# EAGLE board STM32-PROX (EAGLE 6.5.0), part 1 of 2
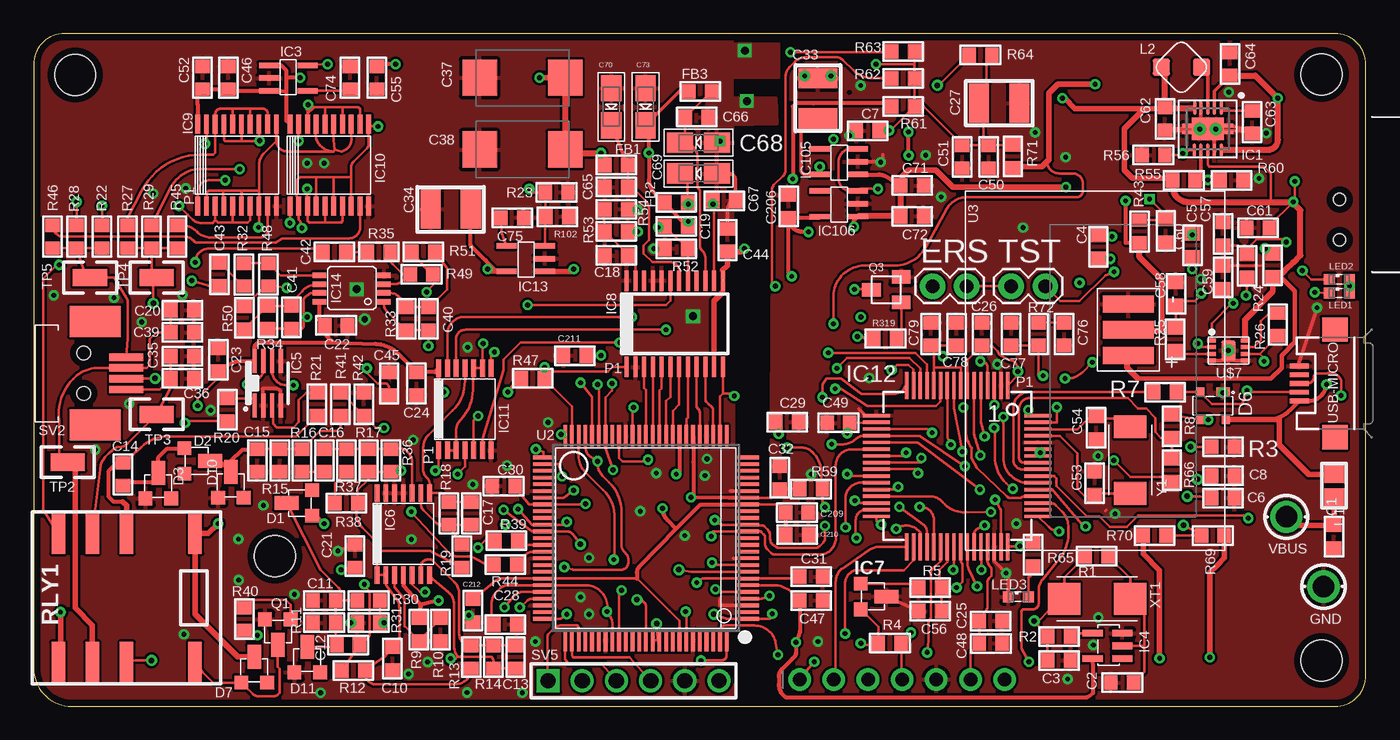
[diagram p0: board, top side]
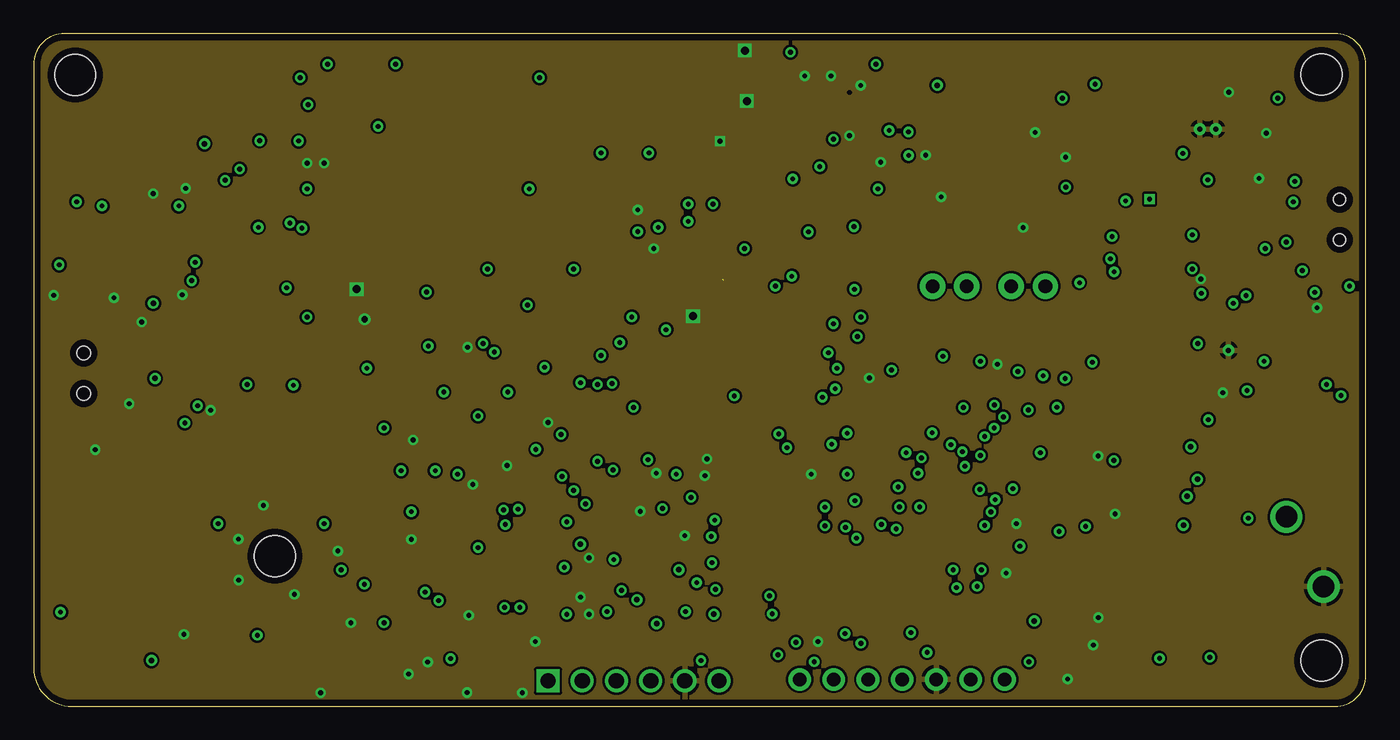
[diagram p1: board, inner layer $GND]
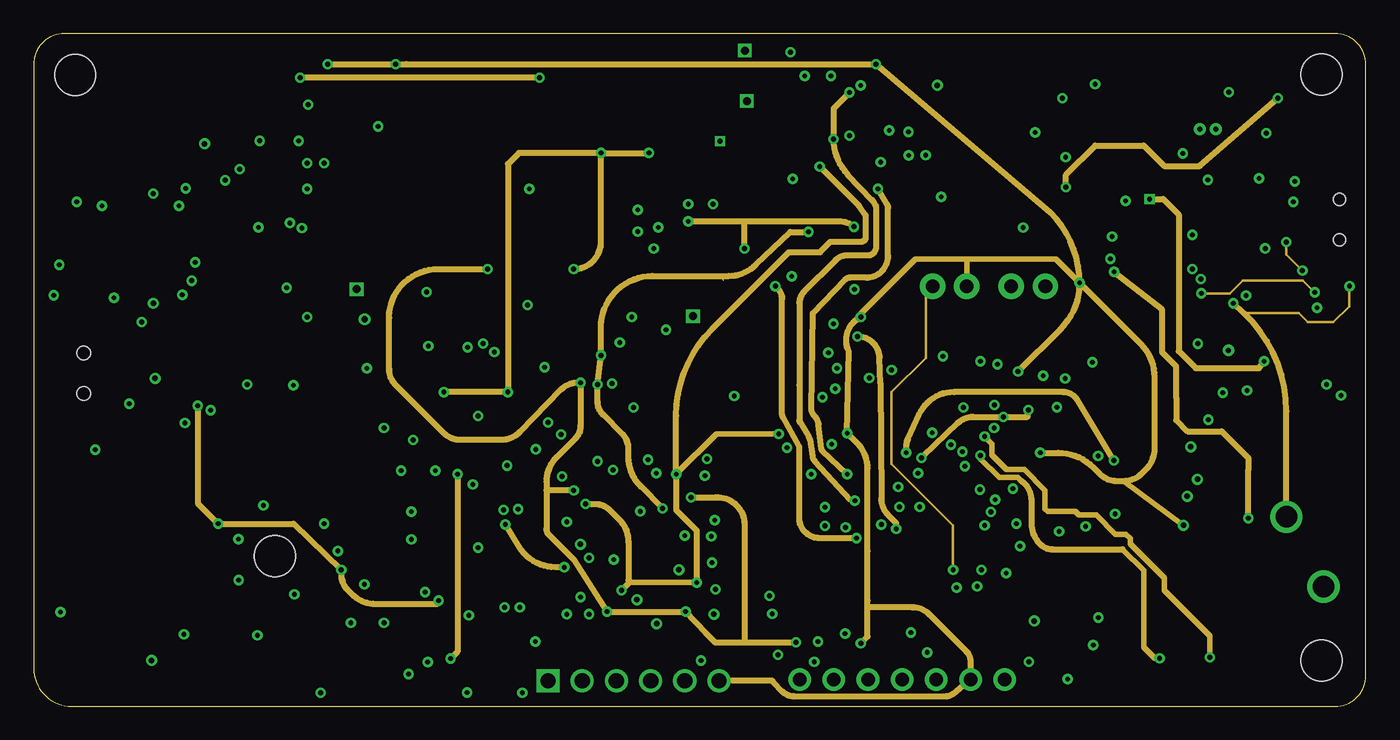
[diagram p2: board, inner layer $VCC]
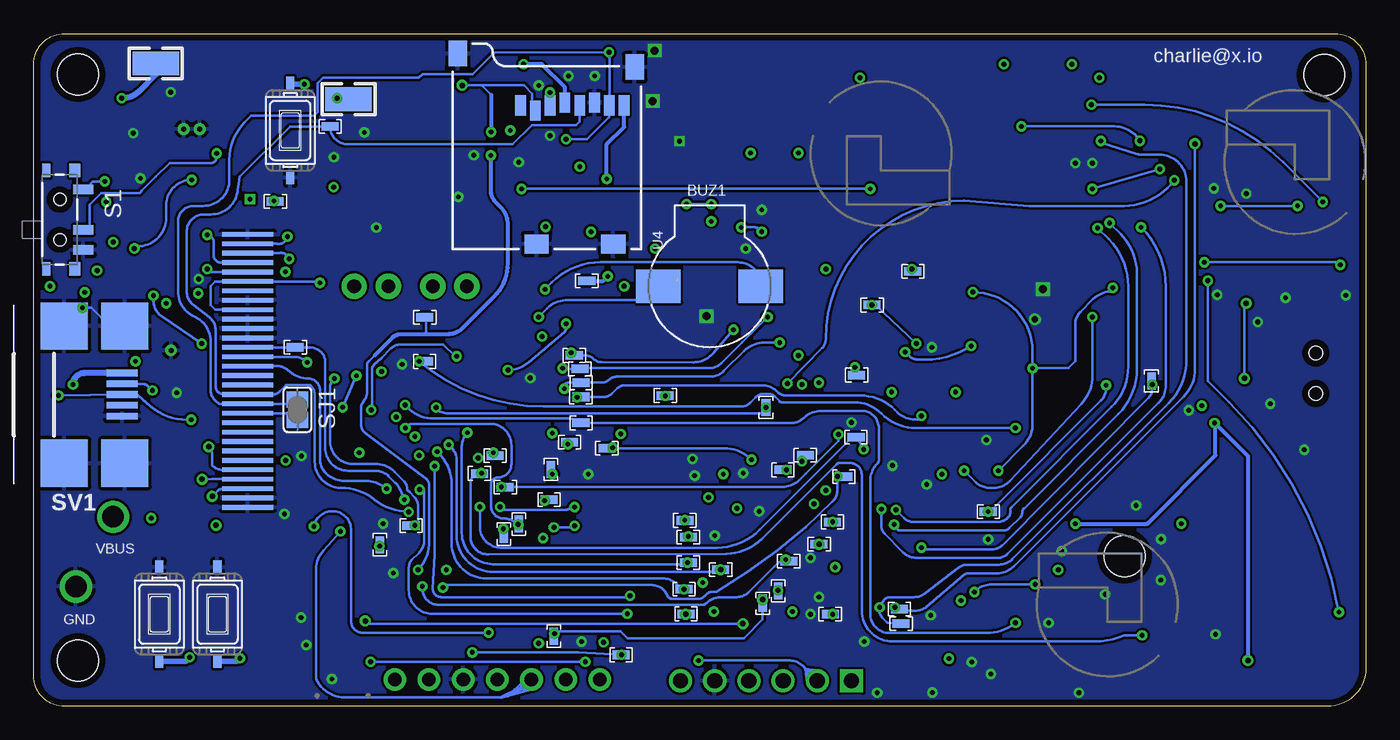
[diagram p3: board, bottom side, seen from below]

Size 99 x 50 mm. Coordinates in mm from the lower left corner, seen from the top.
Outline: 99,2.29 99,47.71 arc90 96.71,50 2.29,50 arc90 0,47.71 0,2.83 arc90 2.83,0 96.71,0 arc90 99,2.29
Copper layers ((1*2)*(3*16)): Top 0.0356mm / dielectric 1.5011mm / $GND 0.0356mm / dielectric 0.1499mm / $VCC 0.0356mm / dielectric 0.2007mm / Bottom 0.0356mm
Design rules "SilverCircuits4layer *": minimum track width 7mil, minimum drill 14mil, track to track 7mil, track to pad 7mil, pad to pad 7mil, via to via 7mil, smd to smd 0mil, copper to edge 20mil, drill to drill 8mil, minimum pad ring 10mil, minimum via ring 8mil, stop-mask expansion 4mil, vias tented up to drill 0mil, thermal gap 10mil
Net classes: 0 default: width 0.203 mm; 1 adc: width 0.203 mm; 2 power: width 0.203 mm, drill 0.254 mm, clearance 0.178 mm

## Footprints (pad centres in the part's own frame; a part is rotated, then mirrored left to right if it is on the bottom)
BUZZER = smd 3.3 x 2.5: 1 3.81,0; 2 -3.81,0
RLC_0603 = smd 1 x 1.1: 1 -0.85,0; 2 0.85,0
RLC_1210 = smd 1.5 x 2.9: 1 -1.5,0; 2 1.5,0
D/7343-31R = smd 2.55 x 2.7: + 3.175,0; - -3.175,0
EIA3216-18/A-R = smd 1.95 x 1.5: + 1.375,0; - -1.375,0
SOT23-3LEAD = smd 1.016 x 1.016: 1 -0.94,-0.762; 2 0.965,-0.762 | smd 1.016 x 1.778: 3 0.013,1.143
USBUG_SOT143B = smd 1 x 0.7: 1 -0.75,-1 | smd 0.6 x 0.7: 2 0.95,-1; 3 0.95,1; 4 -0.95,1
QFN-10 = smd 0.254 x 1.016: 1 -1,-1.57; 2 -0.5,-1.57; 3 0,-1.57; 4 0.5,-1.57; 5 0.975,-1.57; 6 1,1.57; 7 0.5,1.57; 8 0,1.57; 9 -0.5,1.57; 10 -1,1.57 | smd 2.4 x 1.65: P0 0,0 | smd 0.7 x 0.28: P1 -1.55,-0.25; P2 1.55,-0.25; P3 1.55,0.25; P4 -1.55,0.25 | drill 0.381: V0 -0.6,0; V1 0.6,0
SOT-23-5 = smd 0.4 x 1.5: 1 -0.94,-1.422; 2 0.01,-1.422; 3 0.96,-1.422; 4 0.96,1.428; 5 -0.94,1.428
SMV-5 = smd 1.5 x 0.5: 1 0,0; 2 0,-0.95; 3 0,-1.9; 4 2.2,-1.9; 5 2.2,0
SOT-23-8-OR-MSOP-8 = smd 0.325 x 1.8: 1 -0.975,-1.65; 2 -0.325,-1.65; 3 0.325,-1.65; 4 0.975,-1.65; 5 0.975,1.65; 6 0.325,1.65; 7 -0.325,1.65; 8 -0.975,1.65
TSSOP-14 = smd 1.3 x 0.36: 1 0,0; 2 0,-0.65; 3 0,-1.3; 4 0,-1.95; 5 0,-2.6; 6 0,-3.25; 7 0,-3.9; 8 6.095,-3.9; 9 6.095,-3.25; 10 6.095,-2.6; 11 6.095,-1.95; 12 6.095,-1.3; 13 6.095,-0.65; 14 6.095,0
TSSOP-24 = smd 0.3 x 1.5: 1 -2.925,-3.2; 2 -2.275,-3.2; 3 -1.625,-3.2; 4 -0.975,-3.2; 5 -0.325,-3.2; 6 0.325,-3.2; 7 0.975,-3.2; 8 1.625,-3.2; 9 2.275,-3.2; 10 2.925,-3.2; 11 3.575,-3.2; 12 4.225,-3.2; 13 4.225,3.2; 14 3.575,3.2; 15 2.925,3.2; 16 2.275,3.2; 17 1.625,3.2; 18 0.975,3.2; 19 0.325,3.2; 20 -0.325,3.2; 21 -0.975,3.2; 22 -1.625,3.2; 23 -2.275,3.2; 24 -2.925,3.2
TSSOP-20 = smd 1.4 x 0.36: 1 0,0; 2 0,-0.65; 3 0,-1.3; 4 0,-1.95; 5 0,-2.6; 6 0,-3.25; 7 0,-3.9; 8 0,-4.55; 9 0,-5.2; 10 0,-5.85; 11 6.095,-5.85; 12 6.095,-5.2; 13 6.095,-4.55; 14 6.095,-3.9; 15 6.095,-3.25; 16 6.095,-2.6; 17 6.095,-1.95; 18 6.095,-1.3; 19 6.095,-0.65; 20 6.095,0
LQFP-64 = smd 0.25 x 2: 1 -3.81,-6.35; 2 -3.31,-6.35; 3 -2.81,-6.35; 4 -2.31,-6.35; 5 -1.81,-6.35; 6 -1.31,-6.35; 7 -0.81,-6.35; 8 -0.31,-6.35; 9 0.19,-6.35; 10 0.69,-6.35; 11 1.19,-6.35; 12 1.69,-6.35; 13 2.19,-6.35; 14 2.69,-6.35; 15 3.19,-6.35; 16 3.69,-6.35; 33 3.69,5.65; 34 3.19,5.65; 35 2.69,5.65; 36 2.19,5.65; 37 1.69,5.65; 38 1.19,5.65; 39 0.69,5.65; 40 0.19,5.65; 41 -0.31,5.65; 42 -0.81,5.65; 43 -1.31,5.65; 44 -1.81,5.65; 45 -2.31,5.65; 46 -2.81,5.65; 47 -3.31,5.65; 48 -3.81,5.65 | smd 2 x 0.25: 17 5.94,-4.1; 18 5.94,-3.6; 19 5.94,-3.1; 20 5.94,-2.6; 21 5.94,-2.1; 22 5.94,-1.6; 23 5.94,-1.1; 24 5.94,-0.6; 25 5.94,-0.1; 26 5.94,0.4; 27 5.94,0.9; 28 5.94,1.4; 29 5.94,1.9; 30 5.94,2.4; 31 5.94,2.9; 32 5.94,3.4; 49 -6.06,3.4; 50 -6.06,2.9; 51 -6.06,2.4; 52 -6.06,1.9; 53 -6.06,1.4; 54 -6.06,0.9; 55 -6.06,0.4; 56 -6.06,-0.1; 57 -6.06,-0.6; 58 -6.06,-1.1; 59 -6.06,-1.6; 60 -6.06,-2.1; 61 -6.06,-2.6; 62 -6.06,-3.1; 63 -6.06,-3.6; 64 -6.06,-4.1
MSOP8 = smd 0.41 x 1.02: 1 0,0; 2 0.65,0; 3 1.3,0; 4 1.95,0; 5 1.95,4.8; 6 1.3,4.8; 7 0.65,4.8; 8 0,4.8
1X02 = drill 1.016 pad 1.88: 1 0,0; 2 2.54,0
1X07_ROUND = drill 1 pad 1.676: 1 -7.62,0; 2 -5.08,0; 3 -2.54,0; 4 0,0; 5 2.54,0; 6 5.08,0; 7 7.62,0
CDRH2D18 = smd 1.3 x 1.3 rotated 225: P$1 -1.061,1.061 | smd 1.3 x 1.3 rotated 315: P$2 1.061,-1.061
LED_SML0603 = smd 0.8 x 0.8: A 0.75,0; C -0.75,0
SMD-TESTPOINT = smd 1.27 x 0.635: 1 0,0
SOT-23-3 = smd 1 x 1.4: 1 -0.95,-1.1; 2 0.95,-1.1; 3 0,1.1
G6S-2F = smd 1 x 3: 1 -5.08,-4.78; 3 0,-4.78; 4 2.54,-4.78; 5 5.08,-4.78; 8 5.08,4.78; 9 2.54,4.78; 10 0,4.78; 12 -5.08,4.78
SWITCH-SPST-SMD-A = smd 0.7 x 1.5: 1 -2.25,-1.75; 2 -0.75,-1.75; 3 2.25,-1.75 | smd 1 x 0.6: GND1 -3.65,1; GND3 3.65,1 | smd 1 x 0.8: GND2 -3.65,-1.1; GND4 3.65,-1.1 | hole 0.9: -1.5,0; 1.5,0
SOLDERJUMPER_REFLOW = smd 1.168 x 1.6: 1 -0.762,0; 2 0.762,0
USB-MINIB-SMD = smd 2.3 x 0.5: 1 2,0.4; 2 2,-0.4; 3 2,-1.2; 4 2,-2; 5 2,-2.8 | smd 3.5 x 3.5: TAB0 -2.3,3.9; TAB1 2.2,3.9; TAB2 2.2,-6.3; TAB3 -2.3,-6.3
HIROSE-MQ172-4POS = smd 0.55 x 2.5: 1 -1.2,6.75; 2 -0.4,6.75; 3 0.4,6.75; 4 1.2,6.75 | smd 2.3 x 3.8: P$1 -3.85,4.45; P$2 3.85,4.45 | hole 1: -1.5,3.6; 1.5,3.6
HEADER-MALE-6X1-0.100-UNKEYED = drill 1.143 square: 1 0,6.35 | drill 1.143: 2 0,3.81; 3 0,1.27; 4 0,-1.27; 5 0,-3.81; 6 0,-6.35
SW_TACT_3X6 = smd 1 x 0.6: 1 -3.5,0; 2 3.5,0
KEYSTONE-SMD-TESTPOINT-5015 = smd 2.54 x 1.27: 1 0,0
--MERGED_KEYSTONE-SMD-TESTPOINT-5015 = smd 3.429 x 1.778: 1 0,0
KEYSTONE-PTH-TESTPOINT-5011 = drill 1.6: A 0,0
RLC_0805 = smd 1.3 x 1.5: 1 -0.85,0; 2 0.85,0
VQ100 = smd 0.27 x 1.6: 1 -6,-7.6; 2 -5.5,-7.6; 3 -5,-7.6; 4 -4.5,-7.6; 5 -4,-7.6; 6 -3.5,-7.6; 7 -3,-7.6; 8 -2.5,-7.6; 9 -2,-7.6; 10 -1.5,-7.6; 11 -1,-7.6; 12 -0.5,-7.6; 13 0,-7.6; 14 0.5,-7.6; 15 1,-7.6; 16 1.5,-7.6; 17 2,-7.6; 18 2.5,-7.6; 19 3,-7.6; 20 3.5,-7.6; 21 4,-7.6; 22 4.5,-7.6; 23 5,-7.6; 24 5.5,-7.6; 25 6,-7.6; 51 6,7.6; 52 5.5,7.6; 53 5,7.6; 54 4.5,7.6; 55 4,7.6; 56 3.5,7.6; 57 3,7.6; 58 2.5,7.6; 59 2,7.6; 60 1.5,7.6; 61 1,7.6; 62 0.5,7.6; 63 0,7.6; 64 -0.5,7.6; 65 -1,7.6; 66 -1.5,7.6; 67 -2,7.6; 68 -2.5,7.6; 69 -3,7.6; 70 -3.5,7.6; 71 -4,7.6; 72 -4.5,7.6; 73 -5,7.6; 74 -5.5,7.6; 75 -6,7.6 | smd 1.6 x 0.27: 26 7.6,-6; 27 7.6,-5.5; 28 7.6,-5; 29 7.6,-4.5; 30 7.6,-4; 31 7.6,-3.5; 32 7.6,-3; 33 7.6,-2.5; 34 7.6,-2; 35 7.6,-1.5; 36 7.6,-1; 37 7.6,-0.5; 38 7.6,0; 39 7.6,0.5; 40 7.6,1; 41 7.6,1.5; 42 7.6,2; 43 7.6,2.5; 44 7.6,3; 45 7.6,3.5; 46 7.6,4; 47 7.6,4.5; 48 7.6,5; 49 7.6,5.5; 50 7.6,6; 76 -7.6,6; 77 -7.6,5.5; 78 -7.6,5; 79 -7.6,4.5; 80 -7.6,4; 81 -7.6,3.5; 82 -7.6,3; 83 -7.6,2.5; 84 -7.6,2; 85 -7.6,1.5; 86 -7.6,1; 87 -7.6,0.5; 88 -7.6,0; 89 -7.6,-0.5; 90 -7.6,-1; 91 -7.6,-1.5; 92 -7.6,-2; 93 -7.6,-2.5; 94 -7.6,-3; 95 -7.6,-3.5; 96 -7.6,-4; 97 -7.6,-4.5; 98 -7.6,-5; 99 -7.6,-5.5; 100 -7.6,-6
MICROBUILDER_UG-2864HSWEG01_0.96IN_WRAPAROUND = smd 0.35 x 3.81 bottom: 1 -10.15,8.96; 2 -9.45,8.96; 3 -8.75,8.96; 4 -8.05,8.96; 5 -7.35,8.96; 6 -6.65,8.96; 7 -5.95,8.96; 8 -5.25,8.96; 9 -4.55,8.96; 10 -3.85,8.96; 11 -3.15,8.96; 12 -2.45,8.96; 13 -1.75,8.96; 14 -1.05,8.96; 15 -0.35,8.96; 16 0.35,8.96; 17 1.05,8.96; 18 1.75,8.96; 19 2.45,8.96; 20 3.15,8.96; 21 3.85,8.96; 22 4.55,8.96; 23 5.25,8.96; 24 5.95,8.96; 25 6.65,8.96; 26 7.35,8.96; 27 8.05,8.96; 28 8.75,8.96; 29 9.45,8.96; 30 10.15,8.96
MICRO-SD-SOCKET-PP = smd 0.8 x 1.5: 1 -8.94,10.7; 2 -7.84,10.3; 3 -6.74,10.7; 4 -5.64,10.9; 5 -4.54,10.7; 6 -3.44,10.9; 7 -2.34,10.7; 8 -1.24,10.7 | smd 1.8 x 1.4: CD1 -2.05,0.4; CD2 -7.75,0.4 | smd 1.4 x 1.9: GND1 -13.6,14.55; GND3 -0.45,13.55
STAND-OFF-TIGHT = hole 3.048: 0,0
UDFN-EP = smd 0.3 x 0.65: 1 -0.75,-1.25; 2 -0.25,-1.25; 3 0.25,-1.25; 4 0.75,-1.25; 5 0.75,1.25; 6 0.25,1.25; 7 -0.25,1.25; 8 -0.75,1.25 | smd 1.45 x 1.05: 9 0,0 | drill 0.356: V1 0,0
BATT = smd 1.27 x 3.81: 1 -1.905,0; 2 0,0; 3 1.905,0
USB-MICROB = smd 0.35 x 1.4: D+ 0,2.65; D- -0.65,2.65; GND 1.3,2.65; ID 0.65,2.65; VBUS -1.3,2.65 | smd 1.8 x 1.9: MT1 -4,0; MT2 4,0
XTAL-SMD-CITIZEN-CS10 = smd 2.4 x 2.4: A -0.2,0; B 4.7,0
CRYSTAL-TXC-7A = smd 1.7 x 2.4: P$1 2.485,0; P$2 -2.485,0

## Placement (x,y rotation side)
BUZ1  BUZZER  [BUZZER]  48.77,31.23 180 bottom
C1  33nF  [RLC_0603]  96.62,12.61 270 top
C2  22pF  [RLC_0603]  80.9,1.76 180 top
C3  22pF  [RLC_0603]  76.2,3.41 0 top
C4  1uF  [RLC_0603]  79.12,34.15 270 top
C5  1uF  [RLC_0603]  86.11,34.27 270 top
C6  4.7uF  [RLC_0603]  88.39,15.48 0 top
C7  4.7uF  [RLC_0603]  61.98,42.78 180 top
C8  4.7uF  [RLC_0603]  88.39,17.13 0 top
C10  100nF  [RLC_0603]  26.67,3.54 270 top
C11  1nF  [RLC_0603]  21.59,7.86 180 top
C12  1nF  [RLC_0603]  23.37,4.56 0 top
C13  dnp  [RLC_0603]  35.81,3.67 270 top
C14  22pF  [RLC_0603]  6.64,17.24 270 top
C15  130pF  [RLC_0603]  16.61,18.27 270 top
C16  1nF  [RLC_0603]  21.59,18.27 90 top
C17  dnp  [RLC_0603]  32.51,14.34 90 top
C18  33nF  [RLC_0603]  43.31,33.51 180 top
C19  33nF  [RLC_0603]  47.75,34.02 180 top
C20  dnp  [RLC_0603]  11.05,29.45 0 top
C21  33nF  [RLC_0603]  23.88,11.16 90 top
C22  33nF  [RLC_0603]  22.48,28.3 0 top
C23  33nF  [RLC_0603]  13.72,25.77 90 top
C24  33nF  [RLC_0603]  28.45,23.99 270 top
C25  33nF  [RLC_0603]  71.12,6.33 0 top
C26  33nF  [RLC_0603]  70.48,27.67 90 top
C27  4.7uF  [RLC_1210]  71.75,44.81 0 top
C28  33nF  [RLC_0603]  35.05,6.08 0 top
C29  33nF  [RLC_0603]  56.01,21.13 0 top
C30  33nF  [RLC_0603]  34.92,16.37 180 top
C31  33nF  [RLC_0603]  57.78,9.64 0 top
C32  33nF  [RLC_0603]  55.44,17 90 top
C33  4.7uF  [RLC_1210]  58.29,45.2 90 top
C34  4.7uF  [RLC_1210]  30.99,36.94 180 top
C35  47pF  [RLC_0603]  11.05,26.02 0 top
C36  dnp  [RLC_0603]  11.05,24.37 0 top
C37  100uF  [D/7343-31R]  36.32,46.72 0 top
C38  100uF  [D/7343-31R]  36.32,41.39 0 top
C39  1nF  [RLC_0603]  11.05,27.8 0 top
C40  dnp  [RLC_0603]  29.34,28.81 270 top
C41  dnp  [RLC_0603]  19.15,28.91 270 top
C42  1nF  [RLC_0603]  22.35,33.77 0 top
C43  1nF  [RLC_0603]  13.8,32.11 90 top
C44  33nF  [RLC_0603]  51.56,34.66 90 top
C45  100nF  [RLC_0603]  26.42,23.99 90 top
C46  33nF  [RLC_0603]  14.46,46.72 90 top
C47  33nF  [RLC_0603]  57.78,7.86 0 top
C48  100nF  [RLC_0603]  71.13,4.67 0 top
C49  100nF  [RLC_0603]  59.81,21.07 180 top
C50  100nF  [RLC_0603]  70.97,40.85 270 top
C51  100nF  [RLC_0603]  69,40.85 270 top
C52  1uF  [RLC_0603]  12.55,46.72 90 top
C53  22pF  [RLC_0603]  78.84,16.59 270 top
C54  22pF  [RLC_0603]  78.97,20.7 90 top
C55  1uF  [RLC_0603]  25.5,46.72 270 top
C56  100nF  [RLC_0603]  66.63,7.07 180 top
C57  100nF  [RLC_0603]  88.38,35.11 90 top
C58  100nF  [RLC_0603]  84.88,30.67 90 top
C59  1uF  [RLC_0603]  88.37,31.88 90 top
C60  100nF  [RLC_0603]  84.14,35.34 270 top
C61  1uF  [RLC_0603]  90.98,35.56 180 top
C62  10uF  [RLC_0603]  84.07,43.67 270 top
C63  100nF  [RLC_0603]  90.55,43.42 270 top
C64  10uF  [RLC_0603]  88.9,47.74 90 top
C65  100nF  [RLC_0603]  43.31,38.59 180 top
C66  100nF  [RLC_0603]  49.28,43.8 0 top
C67  100nF  [RLC_0603]  51.31,37.58 0 top
C68  4.7uF  [EIA3216-18/A-R]  49.4,41.89 180 top
C69  4.7uF  [EIA3216-18/A-R]  49.4,39.61 180 top
C70  4.7uF  [EIA3216-18/A-R]  42.93,44.56 270 top
C71  100nF  [RLC_0603]  65.28,38.72 0 top
C72  100nF  [RLC_0603]  65.28,36.43 0 top
C73  4.7uF  [EIA3216-18/A-R]  45.47,44.56 270 top
C74  10nF  [RLC_0603]  23.51,46.72 90 top
C75  10nF  [RLC_0603]  35.56,36.31 0 top
C76  33nF  [RLC_0603]  76.58,27.67 90 top
C77  2nF  [RLC_0603]  72.64,27.67 270 top
C78  2.2uF  [RLC_0603]  68.58,27.67 270 top
C79  1nF  [RLC_0603]  66.67,27.67 270 top
C206  4.7uF  [RLC_0603]  56.1,37.16 90 top
C209  100nF  [RLC_0603]  56.72,14.4 0 top
C210  100nF  [RLC_0603]  56.75,12.74 0 top
C211  100nF  [RLC_0603]  40.22,26.07 180 top
C212  100nF  [RLC_0603]  32.64,7.1 270 top
D1  DIODE-SMD-SOT23  [SOT23-3LEAD]  19.94,15.1 90 top
D2  DIODE-SMD-SOT23  [SOT23-3LEAD]  11.96,18.25 270 top
D3  DIODE-SMD-SOT23  [SOT23-3LEAD]  9.26,16.21 0 top
D6  USBUG_PRTR5V0U2X  [USBUG_SOT143B]  87.63,22.34 180 top
D7  DIODE-SMD-SOT23  [SOT23-3LEAD]  16.38,2.52 0 top
D10  DIODE-SMD-SOT23  [SOT23-3LEAD]  14.65,16.27 0 top
D11  DIODE-SMD-SOT23  [SOT23-3LEAD]  20.32,3.29 0 top
FB1  600 OHM  [RLC_0603]  43.31,40.24 180 top
FB2  600 OHM  [RLC_0603]  47.75,37.45 180 top
FB3  600 OHM  [RLC_0603]  49.53,45.7 180 top
IC1  [QFN-10]  87.25,42.91 180 top
IC3  PQ1X331M2ZP-3V3-LDO-SOT-23-5  [SOT-23-5]  18.92,46.7 270 top
IC4  HCU-INVERTER  [SMV-5]  80.9,3.54 180 top
IC5  TLV3502  [SOT-23-8-OR-MSOP-8]  17.4,24.01 0 top
IC6  MCP6294  [TSSOP-14]  25.53,9.76 90 top
IC7  MCP100  [SOT23-3LEAD]  62.23,8.17 270 top
IC8  TLC5540  [TSSOP-24]  46.99,28.43 0 top
IC9  74XX244  [TSSOP-20]  12.19,37.18 90 top
IC10  74XX244  [TSSOP-20]  19.05,37.18 90 top
IC11  CD4066  [TSSOP-14]  30.1,19.03 90 top
IC12  AT91SAM7S512B  [LQFP-64]  68.58,17.51 180 top
IC13  PQ1X331M2ZP-3V3-LDO-SOT-23-5  [SOT-23-5]  36.58,33.26 90 top
IC14  AD8052  [MSOP8]  26.04,30.08 90 top
IC105  MCP1824T-250  [SOT-23-5]  59.84,40.47 90 top
IC106  MCP1824T-120  [SOT-23-5]  59.84,37.34 90 top
JP1  [1X02]  72.64,31.23 0 top
JP2  [1X02]  69.34,31.23 180 top
JP4  [1X07_ROUND]  64.54,2 0 top
L2  CDRH2D18/HPNP-2R2NC  [CDRH2D18]  85.29,47.5 45 top
LED1  [LED_SML0603]  97.03,30.72 0 top
LED2  [LED_SML0603]  97.03,31.73 0 top
LED3  [LED_SML0603]  73.17,8.14 0 top
OE1  TESTPAD  [SMD-TESTPOINT]  43.31,17.57 180 bottom
OE2  TESTPAD  [SMD-TESTPOINT]  41.66,18.65 180 bottom
OE3  TESTPAD  [SMD-TESTPOINT]  34.67,7.22 0 bottom
OE4  TESTPAD  [SMD-TESTPOINT]  34.54,6.13 0 bottom
OE5  TESTPAD  [SMD-TESTPOINT]  28.07,14.46 0 bottom
OE6  TESTPAD  [SMD-TESTPOINT]  15.94,24.18 90 bottom
OE7  TESTPAD  [SMD-TESTPOINT]  39.79,6.84 180 bottom
OE8  TESTPAD  [SMD-TESTPOINT]  44.83,7.67 270 bottom
OE9  TESTPAD  [SMD-TESTPOINT]  52.08,23.1 0 bottom
OE10  TESTPAD  [SMD-TESTPOINT]  40.64,12.05 0 bottom
OE11  TESTPAD  [SMD-TESTPOINT]  39.62,13.7 180 bottom
Q1  NPN-SOT23-2N3904  [SOT23-3LEAD]  18.16,5.7 180 top
Q3  MMBT2222  [SOT-23-3]  63.37,30.96 90 top
R1  1M  [RLC_0603]  78.99,11.16 180 top
R2  10Ohm  [RLC_0603]  76.2,5.19 180 top
R3  820K  [RLC_0603]  88.39,19.29 180 top
R4  10K  [RLC_0603]  63.63,4.68 0 top
R5  10K  [RLC_0603]  66.61,8.81 0 top
R6  0 ohm  [RLC_0603]  92.08,32.78 270 top
R7  27Ohm  [RLC_0603]  84.07,23.35 180 top
R8  27Ohm  [RLC_0603]  84.58,20.81 270 top
R9  100K  [RLC_0603]  28.64,5.7 90 top
R10  100K  [RLC_0603]  30.23,5.7 90 top
R11  510K  [RLC_0603]  21.59,6.21 0 top
R12  100K  [RLC_0603]  23.75,2.65 180 top
R13  10K  [RLC_0603]  32.51,3.67 90 top
R14  10K  [RLC_0603]  34.16,3.67 270 top
R15  10K  [RLC_0603]  18.29,18.27 90 top
R16  zerohm  [RLC_0603]  19.94,18.27 270 top
R17  10K  [RLC_0603]  24.89,18.27 90 top
R18  10K  [RLC_0603]  30.86,14.34 90 top
R19  10K  [RLC_0603]  31.81,11.16 90 top
R20  240K  [RLC_0603]  14.39,22.04 90 top
R21  24K  [RLC_0603]  21.06,22.46 90 top
R22  33Ohm  [RLC_0603]  5.08,34.91 270 top
R23  1K  [RLC_0603]  38.86,38.21 180 top
R24  1K  [RLC_0603]  90.17,32.75 270 top
R25  1K  [RLC_0603]  84.84,27.29 270 top
R26  215.9K  [RLC_0603]  92.46,28.38 270 top
R27  33Ohm  [RLC_0603]  6.99,34.91 270 top
R28  33Ohm  [RLC_0603]  3.17,34.91 270 top
R29  33Ohm  [RLC_0603]  8.76,34.91 270 top
R30  10M  [RLC_0603]  24.89,7.86 0 top
R31  240K  [RLC_0603]  24.89,6.21 0 top
R32  zerohm  [RLC_0603]  15.62,32.09 90 top
R33  2.4K  [RLC_0603]  27.69,28.81 270 top
R34  10K  [RLC_0603]  17.4,28.91 270 top
R35  zerohm  [RLC_0603]  25.65,33.77 0 top
R36  dnp  [RLC_0603]  26.54,18.27 90 top
R37  dnp  [RLC_0603]  23.24,18.27 90 top
R38  dnp  [RLC_0603]  23.24,15.1 180 top
R39  1K  [RLC_0603]  35.12,12.3 0 top
R40  10K  [RLC_0603]  15.65,6.49 90 top
R41  10M  [RLC_0603]  22.81,22.46 90 top
R42  1M  [RLC_0603]  24.54,22.46 270 top
R43  74.74K  [RLC_0603]  82.17,35.29 90 top
R44  1K  [RLC_0603]  35.05,10.53 0 top
R45  10K  [RLC_0603]  10.67,34.91 270 top
R46  10K  [RLC_0603]  1.4,34.91 270 top
R47  10K  [RLC_0603]  37.08,24.37 0 top
R48  dnp  [RLC_0603]  17.45,32.09 90 top
R49  2.4K  [RLC_0603]  28.83,32.11 180 top
R50  10K  [RLC_0603]  15.65,28.89 270 top
R51  2.4K  [RLC_0603]  28.96,33.77 0 top
R52  100Ohm  [RLC_0603]  47.75,35.67 0 top
R53  330Ohm  [RLC_0603]  43.31,35.29 0 top
R54  100Ohm  [RLC_0603]  43.31,36.94 180 top
R55  953K 1%  [RLC_0603]  85.47,39.1 180 top
R56  10K  [RLC_0603]  83.21,40.98 0 top
R59  3.3K  [RLC_0603]  57.77,16.15 180 top
R60  95.3K 1%  [RLC_0603]  89.03,39.1 180 top
R61  10K  [RLC_0603]  64.62,44.59 0 top
R62  10K  [RLC_0603]  64.62,46.67 0 top
R63  10K  [RLC_0603]  64.62,48.67 0 top
R64  10K  [RLC_0603]  70.36,48.41 0 top
R65  330Ohm  [RLC_0603]  74.27,11.27 270 top
R66  1.5K  [RLC_0603]  84.58,17.55 90 top
R69  10K  [RLC_0603]  87.63,12.68 180 top
R70  10K  [RLC_0603]  83.31,12.68 0 top
R71  10K  [RLC_0603]  72.77,40.88 90 top
R72  330Ohm  [RLC_0603]  74.68,27.67 270 top
R102  10K  [RLC_0603]  38.91,36.39 0 top
R319  100Ohm  [RLC_0603]  63.29,27.34 180 top
RLY1  G6S-2H  [G6S-2F]  6.91,8.06 180 top
S1  [SWITCH-SPST-SMD-A]  97.06,36.17 90 bottom
SJ1  [SOLDERJUMPER_REFLOW]  79.39,22.05 270 bottom
SV1  USB-MINIB  [USB-MINIB-SMD]  94.42,24.37 0 bottom
SV2  HIROSE-MQ172-4POS  [HIROSE-MQ172-4POS]  0.13,24.75 270 top
SV5  HEADER-MALE-6X1  [HEADER-MALE-6X1-0.100-UNKEYED]  44.58,1.89 90 top
SW1  SW_TACT_2P-3X6  [SW_TACT_3X6]  79.93,42.81 90 bottom
SW2  SW_TACT_2P-3X6  [SW_TACT_3X6]  85.34,6.84 270 bottom
SW3  SW_TACT_2P-3X6  [SW_TACT_3X6]  89.66,6.84 270 bottom
TP1  TESTPAD  [SMD-TESTPOINT]  36.7,29.83 0 bottom
TP2  TESTPADKEYSTONE-SMD  [KEYSTONE-SMD-TESTPOINT-5015]  2.54,18.14 180 top
TP3  TESTPADKEYSTONE-SMD  [KEYSTONE-SMD-TESTPOINT-5015]  9.14,21.7 180 top
TP4  TESTPADKEYSTONE-SMD  [KEYSTONE-SMD-TESTPOINT-5015]  9.14,31.86 180 top
TP5  TESTPADKEYSTONE-SMD  [KEYSTONE-SMD-TESTPOINT-5015]  4.19,31.86 180 top
TP6  TESTPAD  [SMD-TESTPOINT]  44.58,22.21 90 bottom
TP7  TESTPAD  [SMD-TESTPOINT]  69.93,28.93 0 bottom
TP9  TESTPADKEYSTONE-SMD  [--MERGED_KEYSTONE-SMD-TESTPOINT-5015]  75.61,45.12 0 bottom
TP10  TESTPADKEYSTONE-SMD  [--MERGED_KEYSTONE-SMD-TESTPOINT-5015]  89.92,47.78 0 bottom
TP11  TESTPAD  [SMD-TESTPOINT]  64.07,12.79 90 bottom
TP12  TESTPADKEYSTONE-PTH  [KEYSTONE-PTH-TESTPOINT-5011]  95.86,8.9 0 top
TP16  TESTPAD  [SMD-TESTPOINT]  81.05,37.53 0 bottom
TP18  TESTPAD  [SMD-TESTPOINT]  33.67,32.34 0 bottom
TP19  TESTPAD  [SMD-TESTPOINT]  43.68,8.59 270 bottom
TP20  TESTPAD  [SMD-TESTPOINT]  57.89,31.62 180 bottom
TP22  TESTPAD  [SMD-TESTPOINT]  60.57,17.61 270 bottom
TP23  TESTPAD  [SMD-TESTPOINT]  64.71,18.62 0 bottom
TP24  TESTPAD  [SMD-TESTPOINT]  55.34,3.82 180 bottom
TP25  TESTPAD  [SMD-TESTPOINT]  38.78,17.06 180 bottom
TP26  TESTPAD  [SMD-TESTPOINT]  42.88,10.79 180 bottom
TP28  TESTPAD  [SMD-TESTPOINT]  79.56,26.67 0 bottom
TP29  TESTPAD  [SMD-TESTPOINT]  70.97,13.42 0 bottom
TP30  TESTPAD  [SMD-TESTPOINT]  62.94,13.54 270 bottom
TP31  TESTPAD  [SMD-TESTPOINT]  47.96,10.16 0 bottom
TP32  TESTPAD  [SMD-TESTPOINT]  50.67,8.71 180 bottom
TP33  TESTPAD  [SMD-TESTPOINT]  50.35,10.67 180 bottom
TP34  TESTPAD  [SMD-TESTPOINT]  59.19,19.62 0 bottom
TP35  TESTPAD  [SMD-TESTPOINT]  37.87,20 180 bottom
TP36  TESTPAD  [SMD-TESTPOINT]  73.27,12 90 bottom
TP37  TESTPAD  [SMD-TESTPOINT]  50.6,13.82 180 bottom
TP38  TESTPAD  [SMD-TESTPOINT]  50.35,12.56 180 bottom
TP39  TESTPAD  [SMD-TESTPOINT]  63.97,16.29 0 bottom
TP40  TESTPAD  [SMD-TESTPOINT]  50.52,6.87 180 bottom
TP45  TESTPAD  [SMD-TESTPOINT]  56.4,19.18 180 bottom
TP46  TESTPAD  [SMD-TESTPOINT]  65.87,17.3 180 bottom
TP47  TESTPAD  [SMD-TESTPOINT]  60.35,5.2 90 bottom
TP48  TESTPAD  [SMD-TESTPOINT]  58.82,26.07 180 bottom
TP49  TESTPAD  [SMD-TESTPOINT]  58.33,22.99 180 bottom
TP50  TESTPAD  [SMD-TESTPOINT]  58.31,24.06 180 bottom
TP51  TESTPAD  [SMD-TESTPOINT]  58.4,25.07 180 bottom
TP52  TESTPAD  [SMD-TESTPOINT]  58.34,21.07 0 bottom
TP53  TESTPAD  [SMD-TESTPOINT]  69.94,25.63 180 bottom
TP54  TESTPAD  [SMD-TESTPOINT]  76.97,43.1 0 bottom
TP55  TESTPAD  [SMD-TESTPOINT]  60.69,15.35 180 bottom
TP_ADC_NOE  TESTPAD  [SMD-TESTPOINT]  37.85,24.62 0 bottom
U1  FERRITE0805  [RLC_0805]  96.65,16.39 270 top
U2  XC3S50  [VQ100]  45.5,12.5 90 top
U3  UG-2864HSWEG01  [MICROBUILDER_UG-2864HSWEG01_0.96IN_WRAPAROUND]  74.14,24.93 270 top
U4  SDCARD  [MICRO-SD-SOCKET-PP]  53.88,33.97 0 bottom
U$1  [STAND-OFF-TIGHT]  17.93,11.16 0 top
U$2  [STAND-OFF-TIGHT]  3.09,46.93 0 top
U$6  [STAND-OFF-TIGHT]  95.7,46.97 0 top
U$7  MC34674  [UDFN-EP]  88.79,26.45 270 top
U$9  BATT  [BATT]  81.35,27.98 270 top
U$11  [L1LOGO]  36.02,41.1 90 top
U$12  [L1LOGO]  5.27,40.46 270 top
U$13  [L1LOGO]  19.22,7.56 270 top
U$14  [STAND-OFF-TIGHT]  95.7,3.4 0 top
USB-MICRO  USB-MICROB  [USB-MICROB]  96.7,24 90 top
VBUS  TESTPADKEYSTONE-PTH  [KEYSTONE-PTH-TESTPOINT-5011]  93.09,14.08 180 top
XT1  XTAL-SMD-CITIZEN-CS10  [XTAL-SMD-CITIZEN-CS10]  81.28,7.99 180 top
Y1  16Mhz  [CRYSTAL-TXC-7A]  81.49,18.3 270 top

## Library data of the parts
BUZ1 = STM32-PROX; DIGIKEY: 102-1265-2-ND; MF: CUI Inc; MPN: CCV-084B16-SMT; PARTNO: CCV-084B16-SMT
C1 C18 C19 C21-C26 C28-C32 C44 C46 C47 C52 C55 = STM32-PROX; DIGIKEY: 311-1429-1-ND; MPN: CC0603KRX7R9BB333; OC_NEWARK: unknown; PARTNO: CC0603KRX7R9BB333
C2 C3 C14 C53 C54 = STM32-PROX; DIGIKEY: 445-1273-1-ND; MPN: C1608C0G1H220J080AA; OC_NEWARK: unknown; PARTNO: C1608C0G1H220J080AA
C4 C5 = STM32-PROX; DIGIKEY: 311-1372-2-ND; MF: YAGEO; MPN: CC0603ZRY5V7BB105; OC_NEWARK: unknown; PARTNO: CC0603ZRY5V7BB105
C6-C8 C206 = STM32-PROX; DIGIKEY: 1276-1784-2-ND; MPN: CL10A475KO8NNNC; OC_NEWARK: unknown; PARTNO: CL10A475KO8NNNC
C10 C45 C48-C51 C56 C65-C67 C71 C72 C209-C212 = STM32-PROX; DIGIKEY: 1276-1005-1-ND; MPN: CL10B104KO8NNNC; OC_NEWARK: unknown; PARTNO: CL10B104KO8NNNC
C11 C12 C16 C39 C42 C43 = STM32-PROX; DIGIKEY: 490-1494-2-ND; MPN: GRM188R71H102KA01D; OC_NEWARK: unknown; PARTNO: GRM188R71H102KA01D
C13 C17 C20 C36 C40 C41 R16 R32 R35-R38 R48 SV1 SV5 U3 U4 = STM32-PROX; OC_NEWARK: unknown; PARTNO: *
C15 = STM32-PROX; DIGIKEY: 490-1430-1-ND; MPN: GRM1885C1H131JA01D; OC_NEWARK: unknown; PARTNO: GRM1885C1H131JA01D
C27 C33 C34 = STM32-PROX; DIGIKEY: 1276-1856-1-ND; MPN: CL32B475KOINNNE; OC_NEWARK: unknown; PARTNO: CL32B475KOINNNE
C35 = STM32-PROX; DIGIKEY: 1276-1037-1-ND; MPN: CL10C470JB8NNNC; OC_NEWARK: unknown; PARTNO: CL10C470JB8NNNC
C37 C38 = STM32-PROX; DIGIKEY: 399-3769-1-ND; MPN: T491D107K010AT; OC_NEWARK: unknown; PARTNO: T491D107K010AT
C57 C58 C60 C63 = STM32-PROX; DIGIKEY: 1276-1005-1-ND; MPN: CL10B104KO8NNNC; OC_NEWARK: 85K9474; PARTNO: CL10B104KO8NNNC
C59 C61 = STM32-PROX; DIGIKEY: 311-1372-2-ND; MPN: CC0603ZRY5V7BB105; OC_NEWARK: 06R5073; PARTNO: CC0603ZRY5V7BB105
C62 C64 = STM32-PROX; DIGIKEY: 445-9065-1-ND; DIGIKEY_ALT: 587-3238-1-ND; MPN: C1608X5R1C106M080AB; OC_NEWARK: unknown; PARTNO: C1608X5R1C106M080AB
C68-C70 C73 = microbuilder; DIGIKEY: 399-3698-1-ND; PARTNO: T491A475M010AT
C74 C75 = STM32-PROX; DIGIKEY: 399-1091-2-ND; MPN: C0603C103K5RACTU; OC_NEWARK: unknown; PARTNO: C0603C103K5RACTU
C76 =   merged; DIGIKEY: 311-1429-1-ND; MPN: CC0603KRX7R9BB333; PARTNO: CC0603KRX7R9BB333
C77 =   merged; DIGIKEY: 490-1458-2-ND; MPN: GRM1885C1H202JA01D; PARTNO: GRM1885C1H202JA01D
C78 =   merged; DIGIKEY: 587-1253-1-ND; MPN: LMK107BJ225KA-T; PARTNO: LMK107BJ225KA-T
C79 =   merged; DIGIKEY: 490-1494-2-ND; MF: GRM188R71H102KA01D; OEM: MURATA; PARTNO: GRM188R71H102KA01D
D1-D3 = STM32-PROX; DIGIKEY: BAS21INCT-ND; MF: BAS 21 E6327; MPN: BAS 21 E6327; OC_NEWARK: unknown; PARTNO: BAS 21 E6327
D6 = badge.lbrbadge_2013; DIGIKEY: 568-4140-1-ND; MPN: PRTR5V0U2X,215; PARTNO: PRTR5V0U2X,215
D7 D10 D11 = STM32-PROX; DIGIKEY: BZX84C47-FDICT-ND; MF: BZX84C47-7-F; MPN: BZX84C47-7-F; OC_NEWARK: unknown; PARTNO: BZX84C47-7-F
FB1-FB3 = STM32-PROX; DIGIKEY: 1276-6379-2-ND; PARTNO: CIM10J601NC
IC1 = STM32-PROX; DIGIKEY: 296-21685-1-ND; MPN: TPS61202DRCT; OC_NEWARK: unknown; PARTNO: TPS61202DRCT
IC3 = STM32-PROX; DIGIKEY: 296-18476-1-ND; MPN: LP2985-33DBVR; OC_NEWARK: unknown; PARTNO: LP2985-33DBVR
IC4 = STM32-PROX; DIGIKEY: NC7SZ04M5XCT-ND; MF: NC7SZ04M5X; MPN: NC7SZ04M5X; OC_NEWARK: unknown; PARTNO: NC7SZ04M5X
IC5 = STM32-PROX; DIGIKEY: 296-18147-1-ND; MPN: TLV3502AIDCNT; OC_NEWARK: unknown; PARTNO: TLV3502AIDCNT
IC6 = STM32-PROX; DIGIKEY: MCP6294-E/ST-ND; MPN: MCP6294-E/ST; OC_NEWARK: unknown; PARTNO: MCP6294-E/ST
IC7 = STM32-PROX; DIGIKEY: MCP100T-270I/TTCT-ND; DIGIKEY_ALT: MCP809T-270I/TTDKR-ND; MPN: MCP100T-270I/TT; OC_NEWARK: unknown; PARTNO: MCP100T-270I/TT; PARTNO_ALT: MCP809T-270I/TT
IC8 = STM32-PROX; DIGIKEY: 296-2184-5-ND; MPN: TLC5540IPW; OC_NEWARK: unknown; PARTNO: TLC5540IPW
IC9 IC10 = STM32-PROX; DIGIKEY: 497-2913-1-ND; MF: 74AC244TTR; MPN: 74AC244TTR; OC_NEWARK: unknown; PARTNO: 74AC244TTR
IC11 = STM32-PROX; DIGIKEY: 296-14123-1-ND; MPN: CD4066BPWR; OC_NEWARK: unknown; PARTNO: CD4066BPWR
IC12 = STM32-PROX; DIGIKEY: AT91SAM7S512B-AU-ND; OEM: ATMEL; PARTNO: AT91SAM7S512B-AU
IC13 = STM32-PROX; DIGIKEY: 296-18476-2-ND; MPN: LP2985-33DBVR; OC_NEWARK: unknown; PARTNO: LP2985-33DBVR
IC14 = STM32-PROX; DIGIKEY: AD8052ARMZ-ND; MPN: AD8052ARMZ; OC_NEWARK: unknown; PARTNO: AD8052ARMZ
IC105 = STM32-PROX; DIGIKEY: MCP1824T-2502E/OTCT-ND; MPN: MCP1824T-2502E/OT; OC_NEWARK: unknown; PARTNO: MCP1824T-2502E/OT
IC106 = STM32-PROX; DIGIKEY: MCP1824T-1202E/OTCT-ND; MPN: MCP1824T-1202E/OT; OC_NEWARK: unknown; PARTNO: MCP1824T-1202E/OT
JP1 JP2 = SparkFun-Passives
JP4 = microbuilder
L2 = STM32-PROX; DIGIKEY: 308-2295-1-ND; MF: CDRH2D18/HPNP-2R2NC; MPN: CDRH2D18/HPNP-2R2NC; OC_NEWARK: unknown; PARTNO: CDRH2D18/HPNP-2R2NC
LED1 = STM32-PROX; DIGIKEY: 475-1409-1-ND; MF: LG Q971-KN-1; OC_NEWARK: unknown; PARTNO: *
LED2 = STM32-PROX; DIGIKEY: 475-3016-1-ND; MF: LS Q971-KN-1; OC_NEWARK: unknown; PARTNO: *
LED3 = STM32-PROX; DIGIKEY: 475-2558-1-ND; MF: LY Q976-P1S2-36; OC_NEWARK: unknown; PARTNO: *
OE1-OE11 TP1-TP5 TP_ADC_NOE = STM32-PROX; OC_NEWARK: unknown; PARTNO: NONE
Q1 = STM32-PROX; DIGIKEY: 568-1741-1-ND; MF: PMBT3904,215; MPN: PMBT3904,215; OC_NEWARK: unknown; PARTNO: PMBT3904,215
Q3 = STM32-PROX; DIGIKEY: MMBT2222A-FDITR-ND; MPN: MMBT2222A-7-F; OC_NEWARK: unknown; PARTNO: MMBT2222A-7-F
R1 R42 = STM32-PROX; DIGIKEY: 311-1.0MGRTR-ND; MPN: RC0603JR-071ML; OC_NEWARK: unknown; PARTNO: RC0603JR-071ML
R2 R52 R54 R319 = STM32-PROX; DIGIKEY: RMCF0603JT100RCT-ND; MPN: RMCF0603JT100R; OC_NEWARK: unknown; PARTNO: RMCF0603JT100R
R3 = STM32-PROX; DIGIKEY: 311-820KGRTR-ND; MPN: RC0603JR-07820KL; OC_NEWARK: unknown; PARTNO: RC0603JR-07820KL
R4 R5 R13-R15 R17-R19 R34 R40 R45-R47 R50 R61-R64 R69-R71 R102 = STM32-PROX; DIGIKEY: RMCF0603JT10K0CT-ND; MPN: RMCF0603JT10K0; OC_NEWARK: unknown; PARTNO: RMCF0603JT10K0
R6 R24 R25 R56 = STM32-PROX; DIGIKEY: RMCF0603JT1K00TR-ND; MPN: RMCF0603JT1K00; OC_NEWARK: unknown; PARTNO: RMCF0603JT1K00
R7 R8 = STM32-PROX; DIGIKEY: RMCF0603JT27R0CT-ND; MPN: RMCF0603JT27R0; OC_NEWARK: unknown; PARTNO: RMCF0603JT27R0
R9 R10 R12 = STM32-PROX; DIGIKEY: 311-100KGRTR-ND; MPN: RC0603JR-07100KL; OC_NEWARK: unknown; PARTNO: RC0603JR-07100KL
R11 = STM32-PROX; DIGIKEY: P510KGTR-ND; MPN: ERJ-3GEYJ514V; OC_NEWARK: unknown; PARTNO: ERJ-3GEYJ514V
R20 R31 = STM32-PROX; DIGIKEY: 1276-5119-2-ND; MPN: RC1608J244CS; OC_NEWARK: unknown; PARTNO: RC1608J244CS
R21 = STM32-PROX; DIGIKEY: 311-24KGRTR-ND; MPN: RC0603JR-0724KL; OC_NEWARK: unknown; PARTNO: RC0603JR-0724KL
R22 R27-R29 = STM32-PROX; DIGIKEY: 311-33GRTR-ND; MPN: RC0603JR-0733RL; OC_NEWARK: unknown; PARTNO: RC0603JR-0733RL
R23 R39 R44 = STM32-PROX; DIGIKEY: RMCF0603JT1K00CT-ND; MPN: RMCF0603JT1K00; OC_NEWARK: unknown; PARTNO: RMCF0603JT1K00
R26 = STM32-PROX; DIGIKEY: 541-215KHCT-ND; MPN: CRCW0603215KFKEA; OC_NEWARK: unknown; PARTNO: CRCW0603215KFKEA
R30 R41 = STM32-PROX; DIGIKEY: 311-10MGRTR-ND; MPN: RC0603JR-0710ML; OC_NEWARK: unknown; PARTNO: RC0603JR-0710ML
R33 R49 R51 = STM32-PROX; DIGIKEY: 311-2.40KHRTR-ND; MPN: RC0603FR-072K4L; OC_NEWARK: unknown; PARTNO: RC0603FR-072K4L
R43 = STM32-PROX; DIGIKEY: RMCF0603JT75K0CT-ND; MPN: RMCF0603JT75K0; OC_NEWARK: unknown; PARTNO: RMCF0603JT75K0
R53 R65 = STM32-PROX; DIGIKEY: RMCF0603JT330RCT-ND; MPN: RMCF0603JT330R; OC_NEWARK: unknown; PARTNO: RMCF0603JT330R
R55 = STM32-PROX; DIGIKEY: 311-953KHRCT-ND; MPN: RC0603FR-07953KL; OC_NEWARK: unknown; PARTNO: RC0603FR-07953KL; TOLERANCE: 5%
R59 = STM32-PROX; DIGIKEY: RMCF0603JT3K30CT-ND; MPN: RMCF0603JT3K30; OC_NEWARK: unknown; PARTNO: RMCF0603JT3K30
R60 = STM32-PROX; DIGIKEY: 311-95.3KHRCT-ND; MPN: RC0603FR-0795K3L; OC_NEWARK: unknown; PARTNO: RC0603FR-0795K3L; TOLERANCE: 1%
R66 = STM32-PROX; DIGIKEY: RHM1.5KCGTR-ND; MF: MCR03ERTJ152; MPN: MCR03ERTJ152; OC_NEWARK: unknown; PARTNO: MCR03ERTJ152
R72 =   merged; DIGIKEY: RMCF0603JT330RCT-ND; MPN: RMCF0603JT330R; PARTNO: RMCF0603JT330R
RLY1 = STM32-PROX; DIGIKEY: Z888-ND; MOUSER: 653-G6S-2F-DC5; MPN: G6S-2F-DC5; OEM: OMRON; PARTNO: G6S-2F-DC5
S1 = SparkFun-Electromechanical; OC_NEWARK: unknown; PARTNO: *
SJ1 TP9 TP10 TP12 VBUS = STM32-PROX; MPN: NONE; OC_NEWARK: unknown; PARTNO: NONE
SV2 = STM32-PROX; DIGIKEY: H10488CT-ND; MF: MQ172X-4PA(66); MPN: MQ172X-4PA(66); OC_NEWARK: unknown; PARTNO: MQ172X-4PA(66)
SW1-SW3 = dp_devices
TP6 TP7 TP11 TP16 TP18-TP20 TP22-TP26 TP28-TP40 TP45-TP55 = STM32-PROX; PARTNO: NONE
U1 = STM32-PROX; DIGIKEY: 445-1566-1-ND; MF: MPZ2012S300A; MPN: MPZ2012S300A; OC_NEWARK: unknown; PARTNO: MPZ2012S300A
U2 = STM32-PROX; MPN: XC3S50-5VQ100C (not on bom); OC_NEWARK: unknown; PARTNO: XC3S50-5VQ100C (not on bom)
U$1 U$2 U$6 U$11-U$14 = STM32-PROX
U$7 = STM32-PROX; DIGIKEY: MC34674AEPR2TR-ND; MF: MC34674AEPR2; MOUSER: 841-MC34674AEPR2; MPN: MC34674AEPR2; OC_NEWARK: unknown; PARTNO: MC34674AEPR2
U$9 = STM32-PROX; DIGIKEY: MC34674AEPR2TR-ND; MF: MC34674AEPR2; MPN: MC34674AEPR2; OC_NEWARK: unknown; PARTNO: MC34674AEPR2
USB-MICRO = STM32-PROX; DIGIKEY: A97800CT-ND; MF: 1981568-1; MPN: 1981568-1; OC_NEWARK: unknown; PARTNO: 1981568-1
XT1 = STM32-PROX; DIGIKEY: 535-9101-1-ND; MF: ABM3-13.560MHZ-B2-T; MPN: ABM3-13.560MHZ-B2-T; OC_NEWARK: unknown; PARTNO: ABM3-13.560MHZ-B2-T
Y1 = STM32-PROX; DIGIKEY: 887-1086-1-ND; DIGIKEY_ALT: 535-10881-1-ND; MPN: 7A-16.000MAAJ-T; OC_NEWARK: unknown; PARTDB: 7A-16.000MAAJ-T; PARTNO: 7A-16.000MAAJ-T; PARTNO_ALT: ABM2-16.000MHZ-D4Y-T

## Nets
5V [power]: C21.1 C22.1 C23.1 C24.1 C37.+ C38.+ C44.1 C46.1 C52.1 C64.1 C71.1 C72.1 C73.+ D7.3 FB1.2 FB2.2 FB3.2 IC1.2 IC1.10 IC3.1 IC3.3 IC5.8 IC6.4 IC8.11 IC8.13 IC9.20 IC10.20 IC11.14 IC13.1 IC14.8 IC105.1 IC106.1 R9.2 R47.1 R52.2 RLY1.1 TP10.1
1356_CRYSTAL: C3.1 R1.2 R2.2 U2.89 U2.90 XT1.B
!CS_OLED: IC12.47 TP28.1 U3.13
!CS_SD: IC12.44 R64.1 TP7.1 U4.2
!RES_OLED: IC12.43 TP29.1 U3.14
+1V2 [power]: C206.1 C209.1 C210.1 C211.1 C212.1 IC106.5 TP20.1 U2.18 U2.45 U2.69 U2.93
+2V5 [power]: C29.1 C30.1 C31.1 C33.1 IC105.5 TP19.1 U2.7 U2.33 U2.58 U2.84
+3V3: BUZ1.1 C7.1 C25.1 C26.1 C27.1 C48.1 C49.1 C50.1 C51.1 C55.1 IC3.5 IC7.2 IC12.1 IC12.7 IC12.18 IC12.45 IC12.58 IC12.59 JP1.1 JP2.1 JP4.6 R4.1 R61.2 R62.2 R63.2 R64.2 R69.2 R70.2 R71.2 SV5.6 U3.6 U3.9 U4.4
+3V3-FPGA [power]: C28.1 C32.1 C34.1 C47.1 IC4.5 IC13.5 R59.2 TP18.1 U2.6 U2.19 U2.31 U2.46 U2.57 U2.70 U2.83 U2.94
A_RLY_NC: C14.1 R21.1 RLY1.3
A_RLY_NO: C42.1 RLY1.5
ADC1 [adc]: IC8.3 U2.38
ADC2 [adc]: IC8.4 U2.37
ADC3 [adc]: IC8.5 U2.36
ADC4 [adc]: IC8.6 U2.35
ADC5 [adc]: IC8.7 U2.34
ADC6 [adc]: IC8.8 U2.32
ADC7 [adc]: IC8.9 U2.30
ADC8 [adc]: IC8.10 U2.28
ADC_CLK [adc]: IC8.12 OE9.1 U2.27
ADC_IN: IC8.19 IC11.2 IC11.3 IC11.9 IC11.10 TP1.1
ADC_NOE: IC8.1 R47.2 TP_ADC_NOE.1 U2.49
ADCDR_HI: C17.2 IC6.8 IC11.11 R18.2
ADCDR_LO: C13.2 IC6.7 IC11.4 R14.2
AMPL_HI: IC12.4 R41.2 R42.2 TP53.1
AMPL_LO: IC12.3 R30.2 R31.2 TP52.1
ANT_HI: C35.1 C36.1 RLY1.4 SV2.4 TP3.1
ANT_LO: C20.1 C39.1 RLY1.9 SV2.2 TP2.1
B_RLY_NC: D1.1 R20.1 RLY1.10
B_RLY_NO: C43.1 RLY1.8
CROSS_HI: IC5.6 OE5.1 R44.1
CROSS_LO: IC5.7 OE6.1 R39.1
D/C: IC12.32 TP30.1 U3.15
D_N: IC12.56 R7.2
D_P: IC12.57 R8.2 R66.2
DB2: SJ1.2 U3.20
DBG: OE7.1 U2.75
ERASE: IC12.55 JP1.2
FPGA_CCLK: IC12.41 TP25.1 U2.52
FPGA_DIN: IC12.42 TP26.1 U2.48
FPGA_DONE: IC12.37 TP35.1 U2.51
FPGA_DOUT: IC12.52 TP6.1 U2.40
FPGA_NINIT: IC12.36 R59.1 TP45.1 U2.42
FPGA_NPROGRAM: IC12.38 TP24.1 U2.99
FPGA_ON: IC12.26 IC13.3 IC105.3 IC106.3 R23.2 R102.1 TP22.1
FPGA_TCK: SV5.4 U2.77
FPGA_TDI: SV5.2 U2.100
FPGA_TDO: SV5.3 U2.76
FPGA_TMS: SV5.1 U2.78
GND [power]: C1.2 C2.2 C3.2 C6.2 C7.2 C8.2 C10.2 C11.2 C15.2 C18.2 C19.2 C20.2 C21.2 C22.2 C23.2 C24.2 C25.2 C26.2 C27.2 C28.2 C29.2 C30.2 C31.2 C32.2 C33.2 C34.2 C35.2 C36.2 C37.- C38.- C39.2 C44.2 C45.2 C46.2 C47.2 C48.2 C49.2 C50.2 C51.2 C52.2 C53.1 C54.1 C55.2 C56.2 C57.2 C58.2 C59.2 C60.2 C61.2 C62.2 C63.2 C64.2 C65.2 C66.2 C67.2 C68.- C69.- C70.- C71.2 C72.2 C73.- C74.2 C75.2 C76.1 C77.1 C78.1 C79.1 C206.2 C209.2 C210.2 C211.2 C212.2 D3.1 D6.1 D10.1 D11.1 IC1.4 IC1.9 IC1.P0 IC1.P1 IC1.P2 IC1.P3 IC1.P4 IC1.V0 IC1.V1 IC3.2 IC4.3 IC5.2 IC5.4 IC5.5 IC6.11 IC6.12 IC6.13 IC7.3 IC8.2 IC8.20 IC8.21 IC8.24 IC9.10 IC10.10 IC11.7 IC12.2 IC12.17 IC12.46 IC12.60 IC13.2 IC14.4 IC105.2 IC106.2 JP4.5 LED3.C Q1.2 Q3.2 R3.1 R10.1 R11.1 R15.1 R23.1 R31.1 R42.1 R54.1 R56.1 R60.1 R102.2 S1.1 SV1.5 SV1.TAB0 SV1.TAB1 SV1.TAB2 SV1.TAB3 SV5.5 SW1.1 SW2.1 SW3.1 TP12.A U2.3 U2.10 U2.20 U2.29 U2.41 U2.56 U2.66 U2.73 U2.82 U2.95 U3.1 U3.8 U3.10 U3.11 U3.12 U3.29 U3.30 U4.6 U4.CD1 U4.CD2 U4.GND1 U4.GND3 U$7.4 U$7.5 U$7.9 U$7.V1 U$9.1 USB-MICRO.GND
JTAG_TCK: IC12.53 JP4.4 R4.2
JTAG_TDI: IC12.33 JP4.2
JTAG_TDO: IC12.49 JP4.3
JTAG_TMS: IC12.51 JP4.1
LED3: LED3.A R65.2
LED_A: IC12.48 R65.1 TP36.1
MISO: IC12.27 TP37.1 U2.15
MOSI: IC12.22 TP38.1 U2.14
MOSI_OLED_SD: IC12.30 R63.1 SJ1.1 TP55.1 U3.19 U4.3 U4.7
MUXSEL_HIPKD: IC11.12 IC12.13 TP48.1
MUXSEL_HIRAW: IC11.6 IC12.11 TP50.1
MUXSEL_LOPKD: IC11.5 IC12.16 TP49.1
MUXSEL_LORAW: IC11.13 IC12.14 TP51.1
N$2: C53.2 IC12.61 Y1.P$1
N$3: IC4.4 R2.1
N$4: C2.1 IC4.2 R1.1 XT1.A
N$5: C4.1 U3.2
N$6: C57.1 LED2.C R24.1
N$8: R24.2 U$7.2
N$9: C4.2 U3.3
N$10: C5.1 U3.4
N$11: C5.2 U3.5
N$13: C8.1 U3.27
N$14: IC6.3 R9.1 R10.2
N$15: C17.1 IC6.9 R18.1 R19.2
N$16: C12.2 IC6.5 R12.2
N$17: C13.1 IC6.6 R13.2 R14.1
N$18: C16.1 R16.2
N$19: C11.1 C12.1 D1.3 D11.3 R11.2 R30.1
N$20: C14.2 D2.1 D3.3
N$21: C15.1 D2.3 D10.3 R15.2 R16.1 R41.1
N$22: C16.2 IC6.10 R17.2 R36.2 R37.2
N$23: IC5.1 R20.2
N$24: C18.1 IC8.23 R53.1 R54.2
N$25: C6.1 U3.28
N$26: IC5.3 R21.2
N$27: R39.2 U2.64
N$28: R3.2 U3.26
N$31: R27.2 R29.2 R45.2 SV2.3 TP4.1
N$32: R22.2 R28.2 R46.2 SV2.1 TP5.1
N$33: IC9.12 IC9.14 IC9.16 IC9.18 R27.1
N$34: IC10.12 IC10.14 IC10.16 IC10.18 R28.1
N$35: D7.1 Q1.3 RLY1.12
N$36: C67.1 C69.+ FB2.1 IC8.14
N$37: C66.1 C68.+ FB3.1 IC8.15
N$38: Q1.1 R40.2
N$39: C65.1 C70.+ FB1.1 IC8.18
N$40: R44.2 U2.65
N$41: IC9.3 IC9.5 IC9.7 R22.1
N$42: IC10.3 IC10.5 IC10.7 R29.1
N$43: C41.2 IC11.1 IC14.7 R34.2
N$44: IC9.9 R45.1
N$45: IC10.9 R46.1
N$46: C74.1 IC3.4
N$47: IC14.3 R35.2 R49.2
N$48: C19.1 IC8.17 R52.1 R53.2
N$49: C75.1 IC13.4
N$50: C43.2 R32.1
N$51: C42.2 R35.1
N$52: C40.1 IC14.2 R33.1 R51.2
N$53: C41.1 IC14.6 R34.1 R50.2
N$54: IC14.5 R32.2 R48.2
N$55: C58.1 LED1.C R25.1
N$56: R37.1 R38.2
N$58: U2.43
N$59: BUZ1.2 Q3.3
N$60: Q3.1 R319.1
N$62: C54.2 IC12.62 Y1.P$2
N$63: R25.2 U$7.3
N$64: R26.1 U$7.7
N$65: C60.1 R26.2 R43.2 U$7.6
N$66: C63.1 IC1.1
N$67: IC1.7 R6.1 R55.1 R60.2
N$68: IC1.3 L2.P$2
N$69: IC7.1 R5.1
N$76: C78.2 C79.2 IC12.8 IC12.12 IC12.24 IC12.54 IC12.64
N$78: C77.2 IC12.63 R72.2
N$79: C76.2 R72.1
NCS: IC12.28 TP39.1 U2.50
NRST: C56.1 IC12.39 R5.2
NTC [power]: R43.1 TP16.1 U$9.2
ONOFF: IC1.6 R56.2 S1.2
PCK0: IC12.34 OE8.1 TP47.1 U2.88
PWR_HI: IC9.2 IC9.4 IC9.6 IC9.8 IC9.11 IC10.13 IC10.15 IC10.17 OE11.1 U2.61
PWR_LO: IC9.13 IC9.15 IC9.17 IC10.2 IC10.4 IC10.6 IC10.8 IC10.11 OE10.1 U2.62
PWR_OE1: IC9.1 OE1.1 U2.44
PWR_OE2: IC10.1 OE2.1 U2.47
PWR_OE3: IC9.19 OE3.1 U2.71
PWR_OE4: IC10.19 OE4.1 U2.72
RAW_HI: C40.2 IC11.8 IC14.1 R33.2
RELAY_ON: IC12.25 R40.1 TP46.1
SCLK_OLED_SD: IC12.29 TP54.1 U3.18 U4.5
SD_MOSI_DO: IC12.31 R62.1
SD_RSV: R61.1 U4.8
SPCK: IC12.21 TP40.1 U2.1
SPEAKER: IC12.35 R319.2 TP11.1
SSP_CLK: IC12.19 TP33.1 U2.9
SSP_DIN: IC12.10 TP31.1 U2.8
SSP_DOUT: IC12.9 TP32.1 U2.5
SSP_FRAME: IC12.20 TP34.1 U2.4
SW_K1: IC12.15 R71.1 SW1.2
SW_K2: IC12.6 R70.1 SW2.2
SW_K3: IC12.5 R69.1 SW3.2
TST: IC12.40 JP2.2
USB_PU: IC12.23 R66.1 TP23.1
USBD_N: D6.2 R7.1 SV1.2 USB-MICRO.D-
USBD_P: D6.3 R8.1 SV1.3 USB-MICRO.D+
VBAT+ [power]: C61.1 C62.1 IC1.5 IC1.8 L2.P$1 R6.2 R55.2 S1.3 TP9.1 U$7.8 U$9.3
VBUS [power]: C1.1 C59.1 LED1.A LED2.A U1.2 U$7.1 VBUS.A
VBUS_IN [power]: D6.4 SV1.1 U1.1 USB-MICRO.VBUS
VMID: C10.1 C45.1 IC6.1 IC6.2 R12.1 R13.1 R17.1 R19.1 R36.1 R38.1 R48.1 R49.1 R50.1 R51.1